# Altium PCB PCB2.PcbDoc
Units mil, origin at the board's own origin, x right, y up, seen from the top; angles counter-clockwise.
Board outline 6000 x 4000 mil, 2 copper layers (Top Layer, Bottom Layer); 45 components, 0 nets, 115 pads, 0 vias.
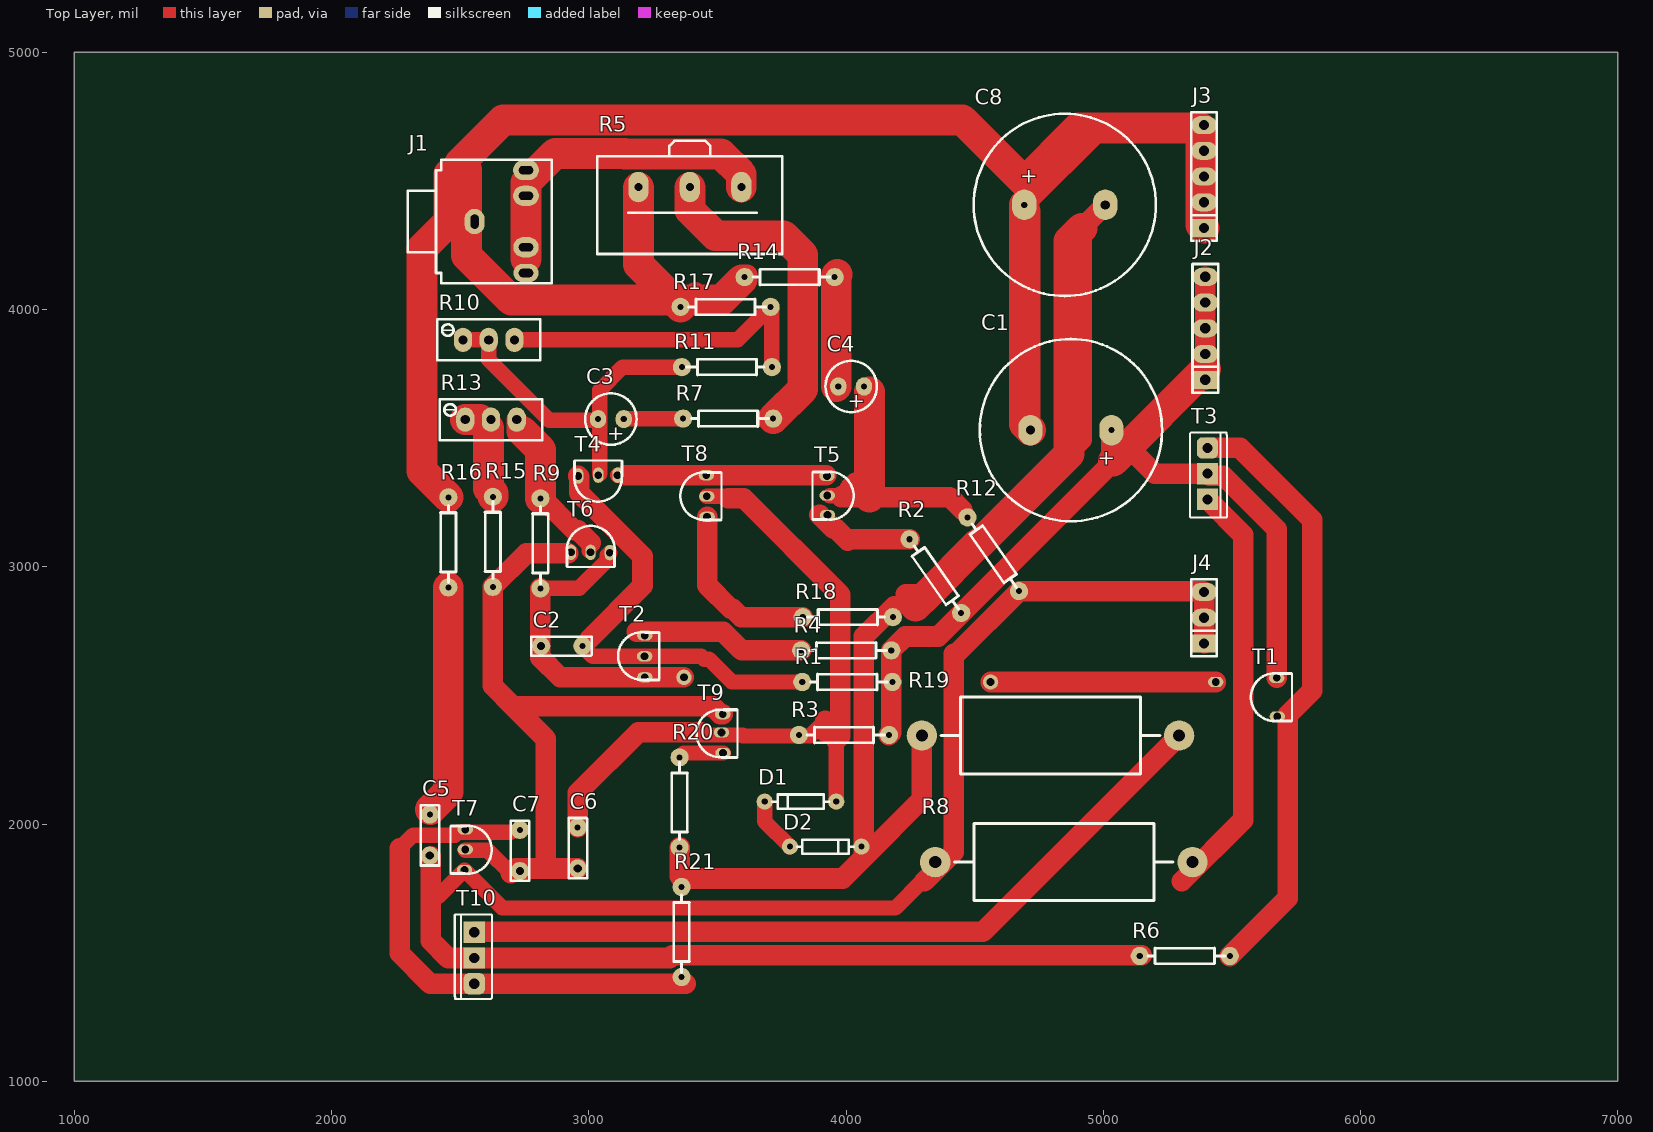
[diagram p0: Top Layer view]
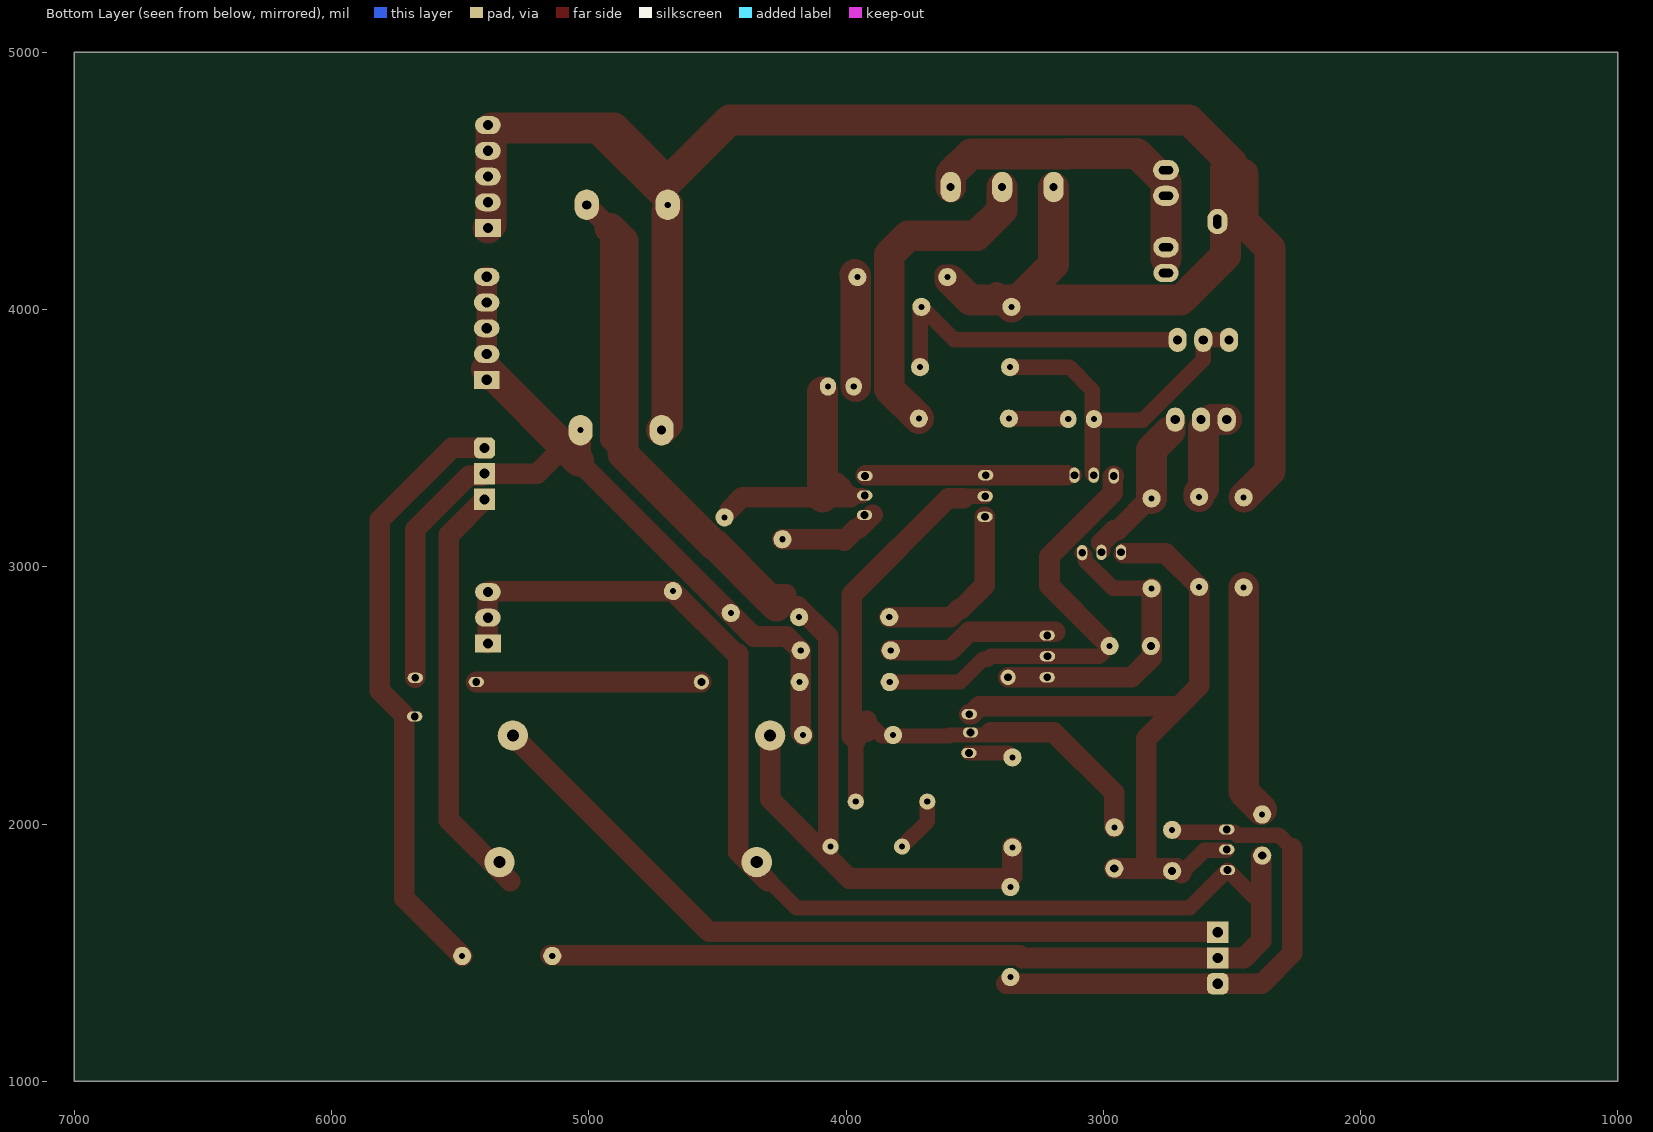
[diagram p1: Bottom Layer view, seen from below]

## Layer stack, top to bottom
Top Solder: solder mask 0.4, Solder Resist, Dk 3.5
Top Layer: signal copper 1.4
Dielectric 1: dielectric 12.6, FR-4, Dk 4.8
Bottom Layer: signal copper 1.4
Bottom Solder: solder mask 0.4, Solder Resist, Dk 3.5

## Board outline
1000,1000 7000,1000 7000,5000 1000,5000

## Design rules (kind name [scope] priority, off if disabled: settings)
Clearance [All] p1: gap=10
PolygonConnect [All] p1: connectstyle=Relief reliefconductorwidth=10 reliefentries=4 polygonreliefangle="90 Angle" airgapwidth=10
RoutingVias [All] p1: holewidth=28 width=50 viastyle="Through Hole" minholewidth=28 minwidth=50 maxholewidth=28 maxwidth=50
SolderMaskExpansion [All] p1: expansion=4
Width [All] p1: maxlimit=10 minlimit=10 preferedwidth=10
29 further rules are at their usual default settings.

## Components (designator, comment, footprint, x,y, rotation, side; value= is the part's Value field where it differs from the comment)
C1 "3300" C18 5032,3531 r180 top
C2 "121" CAP2 2815,2692 r0 top
C3 "10uf" CAO2 3086,3574 r180 top
C4 "CAP3" CAO2 4020,3701 r180 top
C5 "333" CAP2 2382,1877 r90 top
C6 "121" CAP2 2957,1827 r90 top
C7 "121" CAP2 2732,1817 r90 top
C8 "3300" C18 4693,4407 r0 top
D1 "DIODE" DIODE0.2 3962,2087 r180 top
D2 "DIODE" DIODE0.2 3782,1912 r0 top
J1 "IN" SOUND1 2556,4342 r270 top
J2 "CON5" sip-5 5397,3727 r90 top
J3 "CON5" sip-5 5392,4317 r90 top
J4 "CON3" sip-3 5392,2702 r90 top
R1 "2.2k" AXIAL0.3 3830,2552 r0 top
R2 "0" AXIAL0.3 4247,3107 r305 top
R3 "10k" AXIAL0.3 3817,2346 r0 top
R4 "150" AXIAL0.3 3826,2675 r0 top
R5 "RPOT-1" RVR-A 3593,4476 r180 top
R6 "220" AXIAL0.3 5142,1487 r0 top
R7 "1k" AXIAL0.3 3367,3576 r0 top
R8 "220" AXIAL1.0 4347,1852 r0 top
R9 "8k" AXIAL0.3 2812,3266 r270 top
R10 "50k" RVR-4 2511,3882 r180 top
R11 "10k" AXIAL0.3 3712,3776 r180 top
R12 "56k" AXIAL0.3 4472,3192 r305 top
R13 "50k" RVR-4 2520,3572 r180 top
R14 "1k" AXIAL0.3 3606,4126 r0 top
R15 "1k" AXIAL0.3 2627,2922 r90 top
R16 "10" AXIAL0.3 2454,3270 r270 top
R17 "47k" AXIAL0.3 3357,4010.5 r0 top
R18 "620" AXIAL0.3 4182,2804 r180 top
R19 "220" AXIAL1.0 4295,2344 r0 top
R20 "150" AXIAL0.3 3353,1909 r90 top
R21 "220" AXIAL0.3 3361,1755 r270 top
T1 "2N5551" TO-92#1 5677,2442 r270 top
T2 "2N5401" TO-92#2 3217,2602 r270 top
T3 "TIP41" TO-220 5362,3507 r270 top
T4 "2N5551" TO-92#3 3087,3356 r0 top
T5 "2N5551" TO-92#4 3927,3327 r90 top
T6 "2N5551" TO-92#5 2957,3056 r180 top
T7 "2N5401" TO-92#6 2520,1951 r90 top
T8 "2N5551" TO-92#7 3459,3224 r270 top
T9 "2N5551" TO-92#8 3522,2301 r270 top
T10 "TIP41" TO-220 2598,1334 r90 top

## Footprints (in the part's own frame and the unit in brackets; to place one, negate y for a bottom-side part, rotate by r counter-clockwise, add the part's x,y. Pads: shape width x height; smd on the part's side, far side on the other; paste and mask are expansions set on the pad)
AXIAL0.3 [mm]
  round 1.8 hole 0.6: 1(0,0) 2(8.89,0)
  silkscreen extent 0.81,-0.76 8.43,0.76
AXIAL1.0 [mm]
  round 3 hole 1.2: 1(0,0) 2(25.4,0)
  silkscreen extent 1.91,-3.81 23.49,3.81
C18 [mm]
  oval 2.4x3 hole 0.6: 1(0,0)
  oval 2.4x3 hole 0.9: 2(8,0)
  silkscreen extent -5,-9 13,9
CAO2 [mm]
  oval 1.6x1.8 hole 0.6: 1(-1.27,0) 2(1.27,0)
  silkscreen extent -2.54,-2.54 2.54,2.54
CAP2 [mm]
  round 1.8 hole 0.8: 1(0,0)
  round 1.8 hole 0.6: 2(4.064,0)
  silkscreen extent -0.98,-0.95 4.99,0.9
DIODE0.2 [mm]
  round 1.6 hole 0.6: 1(0,0) 2(7.061,0)
  silkscreen extent 0.71,-0.7 6.3,0.7
RVR-4 [mm]
  oval 1.8x2.4 hole 0.9: 1(0,0) 2(-2.54,0) 3(-5.08,0)
  silkscreen extent -7.62,-2.03 2.54,2.03
RVR-A [mm]
  oval 2x3 hole 0.8: 1(0,0) 2(5.08,0) 3(10.16,0)
  silkscreen extent -4.06,-4.57 14.22,6.6
sip-3 [mil]
  rect 70x100 hole 40: 1(0,0)
  oval 70x100 hole 40: 2(100,0) 3(200,0)
  silkscreen extent -50,-50 250,50
sip-5 [mil]
  rect 70x100 hole 40: 1(0,0)
  oval 70x100 hole 40: 2(100,0) 3(200,0) 4(300,0) 5(400,0)
  silkscreen extent -50,-50 450,50
SOUND1 [mm]
  oval 2x2.54 hole 0.8 slot 1.4 at 90 deg: 1(-5.08,5.08) 2(-2.54,5.08)
  oval 2x2.5 hole 0.8 slot 1.4 at 90 deg: 3(2.54,5.08)
  oval 1.8x2.5 hole 0.8 slot 1.4 at 90 deg: 4(5.08,5.08)
  oval 2.5x2 hole 0.8 slot 1.4 at 0 deg: 5(0,0)
  silkscreen extent -6.1,-6.6 6.1,7.62
TO-92#1 [mil]
  oval 40x60 hole 30: 1(24,0) 2(-110,-240) 3(-126,-3)
  silkscreen extent -144,-103 42,57
TO-92#2 [mil]
  oval 40x60 hole 30: 1(-131,1) 2(-50,0) 3(32,1)
  silkscreen extent -144,-103 42,57
TO-92#3 [mil]
  oval 40x60 hole 30: 1(25,0) 2(-50,0) 3(-128,-3)
  silkscreen extent -144,-103 42,57
TO-92#4 [mil]
  oval 40x60 hole 30: 1(26,1) 2(-50,0) 3(-126,-1)
  silkscreen extent -144,-103 42,57
TO-92#5 [mil]
  oval 40x60 hole 30: 1(26,0) 2(-50,0) 3(-125,1)
  silkscreen extent -144,-103 42,57
TO-92#6 [mil]
  oval 40x60 hole 30: 1(-130,3) 2(-50,0) 3(28,0)
  silkscreen extent -144,-103 42,57
TO-92#7 [mil]
  oval 40x60 hole 30: 1(30,1) 2(-50,0) 3(-132,-2)
  silkscreen extent -144,-103 42,57
TO-92#8 [mil]
  oval 40x60 hole 30: 1(25,0) 2(-55,-6) 3(-126,-1)
  silkscreen extent -144,-103 42,57
TO-220 [mm] "整流管"
  rrect50% 2.1x2.1 hole 1: 1(1.143,1.092)
  rect 2.1x2.1 hole 1: 2(3.683,1.092) 3(6.223,1.092)
  silkscreen extent -0.38,-0.64 8,3.02

## Part data
C1 C3 C8: library part CAP3
C2 C5 C6 C7: library part CAP1
J1: library part "PHONEJACK ST"
J2 J3 J4: "Connector"
R1 R2 R3 R4 R6 R7 R8 R9 R11 R12 R14 R15 R16 R17 R18 R19 R20 R21: library part RES
R5: "Potentiometer"
R10 R13: library part RPOT-1, "Potentiometer"
T1 T4 T5 T6 T8 T9: "NPN,小功率"
T2 T7: "PNP,小功率"
T3 T10: "NPN PLASTIC POWER TRANSISTORS"

## Free pads (board coordinates)
  round 60 hole 30: 1(3370,2570) 3(4562,2552)

## Nets (pads, with @x,y where several pads share a name; then routed paths per layer and width w, separated by ;. In a path a pad name is that pad's centre, name@x,y a point inside that pad or via, vN(x,y) a via of type N, cw(c..) or ccw(c..) an arc to the next point about the centre after c; other vN are vias at no path point)
pads on no net: C1.1 C1.2 C2.1 C2.2 C3.1 C3.2 C4.1 C4.2 C5.1 C5.2 C6.1 C6.2 C7.1 C7.2 C8.1 C8.2 D1.1 D1.2 D2.1 D2.2 J1.1 J1.2 J1.3 J1.4 J1.5 J2.1 J2.2 J2.3 J2.4 J2.5 J3.1 J3.2 J3.3 J3.4 J3.5 J4.1 J4.2 J4.3 R1.1 R1.2 R2.1 R2.2 R3.1 R3.2 R4.1 R4.2 R5.1 R5.2 R5.3 R6.1 R6.2 R7.1 R7.2 R8.1 R8.2 R9.1 R9.2 R10.1 R10.2 R10.3 R11.1 R11.2 R12.1 R12.2 R13.1 R13.2 R13.3 R14.1 R14.2 R15.1 R15.2 R16.1 R16.2 R17.1 R17.2 R18.1 R18.2 R19.1 R19.2 R20.1 R20.2 R21.1 R21.2 T1.1 T1.2 T1.3 T2.1 T2.2 T2.3 T3.1 T3.2 T3.3 T4.1 T4.2 T4.3 T5.1 T5.2 T5.3 T6.1 T6.2 T6.3 T7.1 T7.2 T7.3 T8.1 T8.2 T8.3 T9.1 T9.2 T9.3 T10.1 T10.2 T10.3
copper on no net: | length 57579.6
  Top Layer w60: 2265,1905 2317,1957 2480.01,1957 2491.01,1968 2697,1968 ; 2413,1717 2517,1821 2664.43,1673.57 4192,1673.57 4300.22,1781.78 ; 2511,3882 2611,3882 2611,3805 2734,3682 2847,3569 3031,3569 3036,3574 ; 2520,1898 2607,1898 2697,1808 ; 2711,3882 3578.5,3882 3707,4010.5 ; 2756,4142 2756,4197 ; 2812,2916 2963,2916 2963,2917.15 3071,3025.15 3071,3044 3082,3055 ; 2999.93,3086.07 3001,3084.99 3001,3062 ; 3003.5,2720.5 2975,2692 3015,2652 3438,2652 3449,2641 3466.99,2641 3555.99,2552 3830,2552 ; 3043,3362 3043,3682 ; 3043,3687.05 3131.95,3776 3362,3776 ; 3113,3356 3142,3356 ; 3138,3576 3367,3576 ; 3258,2346 3598,2346 ; 3353,2259 3370,2276 3522,2276 ; 3459,3274 3542,3274 3550,3266 ; 3598,2342 3860,2342 3919,2401 ; 3684,2087 3684,2010 3782,1912 ; 3712,3776 3712,4005.5 ; 3839,2796 3839,2804 ; 3936.14,3276 3986,3276 4012,3302 ; 3962,2087 3962,2326 3962,2358 ; 5039,3411 5042.34,3407.66
  Top Layer w80: 2265,1905 2265,1497 2383,1379 2555,1379 3377,1379 ; 2385.23,1873.77 2385.23,1546.77 2453,1479 2555,1479 3314.18,1479 3325.61,1490.43 5150.43,1490.43 ; 2385.23,2040.23 2385.23,2057 ; 2555,1579 2556.43,1580.43 4531.43,1580.43 5295,2344 ; 2697,1808 2716,1827 2832,1827 ; 2720,3527 2720,3572 ; 2812,2916 2812,2647 2889,2570 3218,2570 3370,2570 ; 2812,3273.99 2944.14,3141.86 2958.28,3141.86 3007,3093.14 ; 2921,3051.86 2756.86,3051.86 2627,2922 2627,2537 2707,2457 ; 2957,1827 2832,1827 ; 2957,1987 2957,2121 3192,2356 3437,2356 ; 2959,3353 2963,3349 2963,3287.14 3209,3041.14 3209,2926 3003.5,2720.5 ; 3142,3356 3457,3356 3923,3356 ; 3187,2747 3522,2747 3594,2675 3826,2675 ; 3193,4475.06 3193,4476 ; 3353,1909 3353,1797 3362,1788 3987,1788 4069,1870 ; 3393,4476 3393.47,4475.53 ; 3413.5,4067 3438.25,4042.25 ; 3460,3194 3460,2929 3552,2837 3559.28,2837 3592.28,2804 3832,2804 ; 3521,2427 3512,2427 3482,2457 2707,2457 ; 3542,3266 3550,3266 3603,3266 3977,2892 3977,2341 3962,2326 ; 3596,4116 3616,4136 ; 3897,3202 3952,3147 3962,3147 4007,3102 4012,3107 4247,3107 ; 3919,2358 3919,2401 ; 3986,3276 3981,3271 4092,3271 4403,3271 4452,3222 ; 4012,3302 4036.5,3326.5 ; 4167,2346 4176,2355 4176,2675 4230,2729 4359.14,2729 5032,3401.86 5032,3531 ; 4187,2847 4069,2729 4069,1870 ; 4233,2893 4316,2893 ; 4295,2344 4295,2096 4069,1870 ; 4305,1777 4418.71,1890.71 4418.71,2661.29 4428.75,2661.29 4672.75,2905.3 5388.7,2905.3 5392,2902 5392,2802 5392,2702 ; 4509.57,3086.57 4867,3444 4917,3494 4917,4316.04 5007.96,4407 ; 4562,2552 5437,2552 ; 4717.04,3531 4717.04,4382.96 4693,4407 4991,4705 5003,4717 5392,4717 5392,4617 5392,4517 5392,4417 5392,4317 ; 5095.5,3467.5 5201,3362 5405,3362 5413.66,3353.34 5467.05,3353.34 5674,3146.39 5674,2568 ; 5305,1777 5543.5,2015.5 5543.5,3123.5 5405,3262 ; 5355,3727 5397,3727 5397,3769 5397,3827 5397,3927 5397,4027 5397,4127 ; 5405,3462 5532,3462 5812,3182 5812,2519.01 5716.99,2424 5716.99,1711.99 5492,1487 ; 2707,2457 2832,2332 2832,1827
  Top Layer w120: 2385.23,2057 2454,2125.77 2454,2920 ; 2454,3270 2352,3372 2352,4237 2457,4342 2457,4527 ; 2499.5,4569.5 2667,4737 4452,4737 4693,4496 4902,4705 4991,4705 5380,4705 5380,4329 5392,4317 ; 2520,3572 2577,3572 2610,3539 2610,3303.43 2627,3286.43 2627,3272 ; 2525.06,4543.94 2525.06,4210.06 2698.55,4036.57 3330.93,4036.57 ; 2740,3527 2812,3455 2812,3273.99 2812,3266 ; 2756,4197 2756,4242 2756,4442 2756,4493.45 2869.55,4607 3141.1,4607 3139.15,4605.06 3513.95,4605.06 3593,4526 3593,4476 ; 3193,4475.06 3193,4174.5 3330.93,4036.57 ; 3357,4010.5 3330.93,4036.57 ; 3393,4475.06 3393,4386 3492,4287 3757,4287 3832,4212 3832,3691 3717,3576 ; 3596,4116 3516.57,4036.57 3330.93,4036.57 ; 3962,3701 3962,4132 3966,4136 ; 4092,3271 4092,3680.5 ; 4270,2847 4316,2893 4509.57,3086.57 4515.67,3086.57 4867,3437.9 4867,3444 4867,4266.04 4917,4316.04 ; 4693,4407 4693,3555.04 4717.04,3531 ; 5039,3411 5095.5,3467.5 5355,3727 5397,3769

## Text inside footprints (layer, text, board x,y; h text height)
C1: Top Overlay "+" at 5046.76,3445.37 h60 r180
C3: Top Overlay "+" at 3140.13,3540.53 h60 r180
C4: Top Overlay "+" at 4074.13,3667.53 h60 r180
C8: Top Overlay "+" at 4678.24,4492.63 h60